# Altium PCB SMD_BD6.2-D3.6.pcbdoc
Units mil, origin at the board's own origin, x right, y up, seen from the top; angles counter-clockwise.
Board outline 780 x 780 mil, 2 copper layers (Top Layer, Bottom Layer); 1 components, 0 nets, 4 pads, 0 vias.
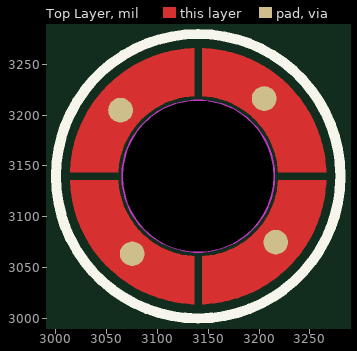
[diagram p0: Top Layer view]
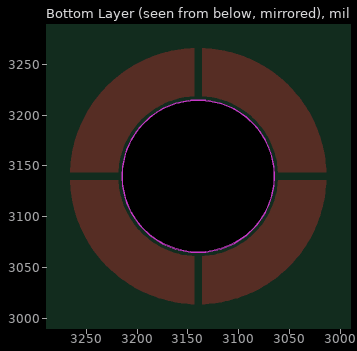
[diagram p1: Bottom Layer view, seen from below]

## Layer stack, top to bottom
Top Solder Mask Layer: solder mask 0.4, Solder Resist, Dk 3.5
Top Layer: signal copper 1.4
Dielectric1: dielectric 12.6, FR-4, Dk 4.8
Bottom Layer: signal copper 1.4
Bottom Solder Mask Layer: solder mask 0.4, Solder Resist, Dk 3.5

## Board outline
3530,2750 2750,2750 2750,3530 3530,3530

## Design rules (kind name [scope] priority, off if disabled: settings)
BoardOutlineClearance safeClearance_1 [All] p1: gap=10 ignorepadtopadclearanceinfootprint=FALSE except(0: Arc-SplitContinuation Track-SplitContinuation SMDPad-SplitContinuation THPad-SplitContinuation Via-SplitContinuation Fill-SplitContinuation Poly-SplitContinuation Region-SplitContinuation Text-SplitContinuation; 6: Track-CutoutEdge SMDPad-CutoutEdge THPad-CutoutEdge Via-CutoutEdge Fill-CutoutEdge Region-CutoutEdge; 11.8: Track-OutlineEdge SMDPad-OutlineEdge THPad-OutlineEdge Via-OutlineEdge Fill-OutlineEdge Poly-OutlineEdge Region-OutlineEdge Text-OutlineEdge)
Clearance safeClearance [All] p1: gap=6 ignorepadtopadclearanceinfootprint=FALSE except(6.9: Track-Hole SMDPad-Hole THPad-Hole Via-Hole Fill-Hole Poly-Hole Region-Hole Text-Hole; 7: Arc-Arc Arc-Track Arc-SMDPad Arc-THPad Arc-Via Arc-Fill Arc-Poly Arc-Region Arc-Text Arc-Hole)
DiffPairsRouting differentialPair [All] p1: maxlimit=6 minlimit=6 mostfreqgap=6 toplayer_minwidth=5 toplayer_maxwidth=100 toplayer_prefwidth=10 bottomlayer_minwidth=5 bottomlayer_maxwidth=100 bottomlayer_prefwidth=10 maxuncoupledlength=10
PasteMaskExpansion pasteMaskExpansion [All] p1: expansion=0
PlaneConnect innerPlane [All] p1: planeconnectstyle=Relief reliefexpansion=20 reliefentries=4 reliefconductorwidth=10 reliefairgap=10
PolygonConnect copperRegion [All] p1: connectstyle=Relief reliefconductorwidth=10 reliefentries=4 polygonreliefangle="90 Angle" airgapwidth=10
RoutingVias viaSize [All] p1: holewidth=12.01 width=24.02 viastyle="Through Hole" minholewidth=11.81 minwidth=19.68 maxholewidth=236.22 maxwidth=393.7
SolderMaskExpansion solderMaskExpansion [All] p1: expansion=2 istentingtop=FALSE useseparateexpansions=TRUE expansionbottom=2 istentingbottom=FALSE
Width trackWidth [All] p1: maxlimit=100 minlimit=5 preferedwidth=10
27 further rules are at their usual default settings.

## Components (designator, comment, footprint, x,y, rotation, side; value= is the part's Value field where it differs from the comment)
? "SMD_BD6.2-D3.6" SMD_BD6.2-D3.6 3140,3140 r0 top

## Footprints (in the part's own frame and the unit in brackets; to place one, negate y for a bottom-side part, rotate by r counter-clockwise, add the part's x,y. Pads: shape width x height; smd on the part's side, far side on the other; paste and mask are expansions set on the pad)
SMD_BD6.2-D3.6 [mm]
  round 0.62 smd: 1(-1.94,1.65) 1(-1.65,-1.94) 1(1.65,1.94) 1(1.94,-1.65)
  Top Layer region: 2,0.1 1.996,0.164 1.99,0.228 1.981,0.291 1.971,0.354 1.959,0.417 1.945,0.48 1.928,0.542 1.91,0.603 1.89,0.664 1.868,0.724 1.844,0.783 1.818,0.842 1.79,0.899 1.76,0.956 1.729,1.012 1.696,1.067 1.661,1.12 1.624,1.173 1.586,1.224 1.546,1.274 1.504,1.323 1.461,1.371 1.417,1.417 1.371,1.461 1.323,1.504 1.274,1.546 1.224,1.586 1.173,1.624 1.12,1.661 1.067,1.696 1.012,1.729 0.956,1.76 0.899,1.79 0.842,1.818 0.783,1.844 0.724,1.868 0.664,1.89 0.603,1.91 0.542,1.928 0.48,1.945 0.417,1.959 0.354,1.971 0.291,1.981 0.228,1.99 0.164,1.996 0.1,2 0.1,3.2 0.182,3.196 0.263,3.191 0.345,3.183 0.426,3.173 0.507,3.161 0.588,3.147 0.668,3.131 0.748,3.113 0.827,3.093 0.906,3.071 0.984,3.047 1.062,3.021 1.139,2.993 1.215,2.963 1.29,2.931 1.365,2.897 1.438,2.861 1.511,2.823 1.583,2.784 1.653,2.742 1.723,2.699 1.791,2.654 1.859,2.608 1.925,2.559 1.989,2.509 2.053,2.458 2.115,2.404 2.176,2.349 2.235,2.293 2.293,2.235 2.349,2.176 2.404,2.115 2.458,2.053 2.509,1.989 2.559,1.925 2.608,1.859 2.654,1.791 2.699,1.723 2.742,1.653 2.784,1.583 2.823,1.511 2.861,1.438 2.897,1.365 2.931,1.29 2.963,1.215 2.993,1.139 3.021,1.062 3.047,0.984 3.071,0.906 3.093,0.827 3.113,0.748 3.131,0.668 3.147,0.588 3.161,0.507 3.173,0.426 3.183,0.345 3.191,0.263 3.196,0.182 3.2,0.1
  Top Layer region: -0.1,2 -0.164,1.996 -0.228,1.99 -0.291,1.981 -0.354,1.971 -0.417,1.959 -0.48,1.945 -0.542,1.928 -0.603,1.91 -0.664,1.89 -0.724,1.868 -0.783,1.844 -0.842,1.818 -0.899,1.79 -0.956,1.76 -1.012,1.729 -1.067,1.696 -1.12,1.661 -1.173,1.624 -1.224,1.586 -1.274,1.546 -1.323,1.504 -1.371,1.461 -1.417,1.417 -1.461,1.371 -1.504,1.323 -1.546,1.274 -1.586,1.224 -1.624,1.173 -1.661,1.12 -1.696,1.067 -1.729,1.012 -1.76,0.956 -1.79,0.899 -1.818,0.842 -1.844,0.783 -1.868,0.724 -1.89,0.664 -1.91,0.603 -1.928,0.542 -1.945,0.48 -1.959,0.417 -1.971,0.354 -1.981,0.291 -1.99,0.228 -1.996,0.164 -2,0.1 -3.2,0.1 -3.196,0.182 -3.191,0.263 -3.183,0.345 -3.173,0.426 -3.161,0.507 -3.147,0.588 -3.131,0.668 -3.113,0.748 -3.093,0.827 -3.071,0.906 -3.047,0.984 -3.021,1.062 -2.993,1.139 -2.963,1.215 -2.931,1.29 -2.897,1.365 -2.861,1.438 -2.823,1.511 -2.784,1.583 -2.742,1.653 -2.699,1.723 -2.654,1.791 -2.608,1.859 -2.559,1.925 -2.509,1.989 -2.458,2.053 -2.404,2.115 -2.349,2.176 -2.293,2.235 -2.235,2.293 -2.176,2.349 -2.115,2.404 -2.053,2.458 -1.989,2.509 -1.925,2.559 -1.859,2.608 -1.791,2.654 -1.723,2.699 -1.653,2.742 -1.583,2.784 -1.511,2.823 -1.438,2.861 -1.365,2.897 -1.29,2.931 -1.215,2.963 -1.139,2.993 -1.062,3.021 -0.984,3.047 -0.906,3.071 -0.827,3.093 -0.748,3.113 -0.668,3.131 -0.588,3.147 -0.507,3.161 -0.426,3.173 -0.345,3.183 -0.263,3.191 -0.182,3.196 -0.1,3.2
  Top Layer region: -2,-0.1 -1.996,-0.164 -1.99,-0.228 -1.981,-0.291 -1.971,-0.354 -1.959,-0.417 -1.945,-0.48 -1.928,-0.542 -1.91,-0.603 -1.89,-0.664 -1.868,-0.724 -1.844,-0.783 -1.818,-0.842 -1.79,-0.899 -1.76,-0.956 -1.729,-1.012 -1.696,-1.067 -1.661,-1.12 -1.624,-1.173 -1.586,-1.224 -1.546,-1.274 -1.504,-1.323 -1.461,-1.371 -1.417,-1.417 -1.371,-1.461 -1.323,-1.504 -1.274,-1.546 -1.224,-1.586 -1.173,-1.624 -1.12,-1.661 -1.067,-1.696 -1.012,-1.729 -0.956,-1.76 -0.899,-1.79 -0.842,-1.818 -0.783,-1.844 -0.724,-1.868 -0.664,-1.89 -0.603,-1.91 -0.542,-1.928 -0.48,-1.945 -0.417,-1.959 -0.354,-1.971 -0.291,-1.981 -0.228,-1.99 -0.164,-1.996 -0.1,-2 -0.1,-3.2 -0.182,-3.196 -0.263,-3.191 -0.345,-3.183 -0.426,-3.173 -0.507,-3.161 -0.588,-3.147 -0.668,-3.131 -0.748,-3.113 -0.827,-3.093 -0.906,-3.071 -0.984,-3.047 -1.062,-3.021 -1.139,-2.993 -1.215,-2.963 -1.29,-2.931 -1.365,-2.897 -1.438,-2.861 -1.511,-2.823 -1.583,-2.784 -1.653,-2.742 -1.723,-2.699 -1.791,-2.654 -1.859,-2.608 -1.925,-2.559 -1.989,-2.509 -2.053,-2.458 -2.115,-2.404 -2.176,-2.349 -2.235,-2.293 -2.293,-2.235 -2.349,-2.176 -2.404,-2.115 -2.458,-2.053 -2.509,-1.989 -2.559,-1.925 -2.608,-1.859 -2.654,-1.791 -2.699,-1.723 -2.742,-1.653 -2.784,-1.583 -2.823,-1.511 -2.861,-1.438 -2.897,-1.365 -2.931,-1.29 -2.963,-1.215 -2.993,-1.139 -3.021,-1.062 -3.047,-0.984 -3.071,-0.906 -3.093,-0.827 -3.113,-0.748 -3.131,-0.668 -3.147,-0.588 -3.161,-0.507 -3.173,-0.426 -3.183,-0.345 -3.191,-0.263 -3.196,-0.182 -3.2,-0.1
  Top Layer region: 0.1,-2 0.164,-1.996 0.228,-1.99 0.291,-1.981 0.354,-1.971 0.417,-1.959 0.48,-1.945 0.542,-1.928 0.603,-1.91 0.664,-1.89 0.724,-1.868 0.783,-1.844 0.842,-1.818 0.899,-1.79 0.956,-1.76 1.012,-1.729 1.067,-1.696 1.12,-1.661 1.173,-1.624 1.224,-1.586 1.274,-1.546 1.323,-1.504 1.371,-1.461 1.417,-1.417 1.461,-1.371 1.504,-1.323 1.546,-1.274 1.586,-1.224 1.624,-1.173 1.661,-1.12 1.696,-1.067 1.729,-1.012 1.76,-0.956 1.79,-0.899 1.818,-0.842 1.844,-0.783 1.868,-0.724 1.89,-0.664 1.91,-0.603 1.928,-0.542 1.945,-0.48 1.959,-0.417 1.971,-0.354 1.981,-0.291 1.99,-0.228 1.996,-0.164 2,-0.1 3.2,-0.1 3.196,-0.182 3.191,-0.263 3.183,-0.345 3.173,-0.426 3.161,-0.507 3.147,-0.588 3.131,-0.668 3.113,-0.748 3.093,-0.827 3.071,-0.906 3.047,-0.984 3.021,-1.062 2.993,-1.139 2.963,-1.215 2.931,-1.29 2.897,-1.365 2.861,-1.438 2.823,-1.511 2.784,-1.583 2.742,-1.653 2.699,-1.723 2.654,-1.791 2.608,-1.859 2.559,-1.925 2.509,-1.989 2.458,-2.053 2.404,-2.115 2.349,-2.176 2.293,-2.235 2.235,-2.293 2.176,-2.349 2.115,-2.404 2.053,-2.458 1.989,-2.509 1.925,-2.559 1.859,-2.608 1.791,-2.654 1.723,-2.699 1.653,-2.742 1.583,-2.784 1.511,-2.823 1.438,-2.861 1.365,-2.897 1.29,-2.931 1.215,-2.963 1.139,-2.993 1.062,-3.021 0.984,-3.047 0.906,-3.071 0.827,-3.093 0.748,-3.113 0.668,-3.131 0.588,-3.147 0.507,-3.161 0.426,-3.173 0.345,-3.183 0.263,-3.191 0.182,-3.196 0.1,-3.2
  Board Outline Layer board cut-out: 1.9,0 1.9,-0.187 1.827,-0.554 1.684,-0.9 1.476,-1.211 1.211,-1.476 0.9,-1.684 0.554,-1.827 0.187,-1.9 -0.187,-1.9 -0.554,-1.827 -0.9,-1.684 -1.211,-1.476 -1.476,-1.211 -1.684,-0.9 -1.827,-0.554 -1.9,-0.187 -1.9,0 -1.9,0.187 -1.827,0.554 -1.684,0.9 -1.476,1.211 -1.211,1.476 -0.9,1.684 -0.554,1.827 -0.187,1.9 0.187,1.9 0.554,1.827 0.9,1.684 1.211,1.476 1.476,1.211 1.684,0.9 1.827,0.554 1.9,0.187 1.9,0
  Board Outline Layer circle w0.025: c0,0 r1.9
  Board Outline Layer region: 1.9,0 1.9,-0.187 1.827,-0.554 1.684,-0.9 1.476,-1.211 1.211,-1.476 0.9,-1.684 0.554,-1.827 0.187,-1.9 -0.187,-1.9 -0.554,-1.827 -0.9,-1.684 -1.211,-1.476 -1.476,-1.211 -1.684,-0.9 -1.827,-0.554 -1.9,-0.187 -1.9,0 -1.9,0.187 -1.827,0.554 -1.684,0.9 -1.476,1.211 -1.211,1.476 -0.9,1.684 -0.554,1.827 -0.187,1.9 0.187,1.9 0.554,1.827 0.9,1.684 1.211,1.476 1.476,1.211 1.684,0.9 1.827,0.554 1.9,0.187 1.9,0
  silkscreen extent -3.56,-3.56 3.56,3.56

## Nets (pads, with @x,y where several pads share a name; then routed paths per layer and width w, separated by ;. In a path a pad name is that pad's centre, name@x,y a point inside that pad or via, vN(x,y) a via of type N, cw(c..) or ccw(c..) an arc to the next point about the centre after c; other vN are vias at no path point)
pads on no net: ?.1